# Altium PCB SemiPuente.PcbDoc
Units mm, origin at the board's own origin, x right, y up, seen from the top; angles counter-clockwise.
Board outline 100 x 99.9 mm, 2 copper layers (Top Layer, Bottom Layer); 17 components, 7 nets, 31 pads, 0 vias.
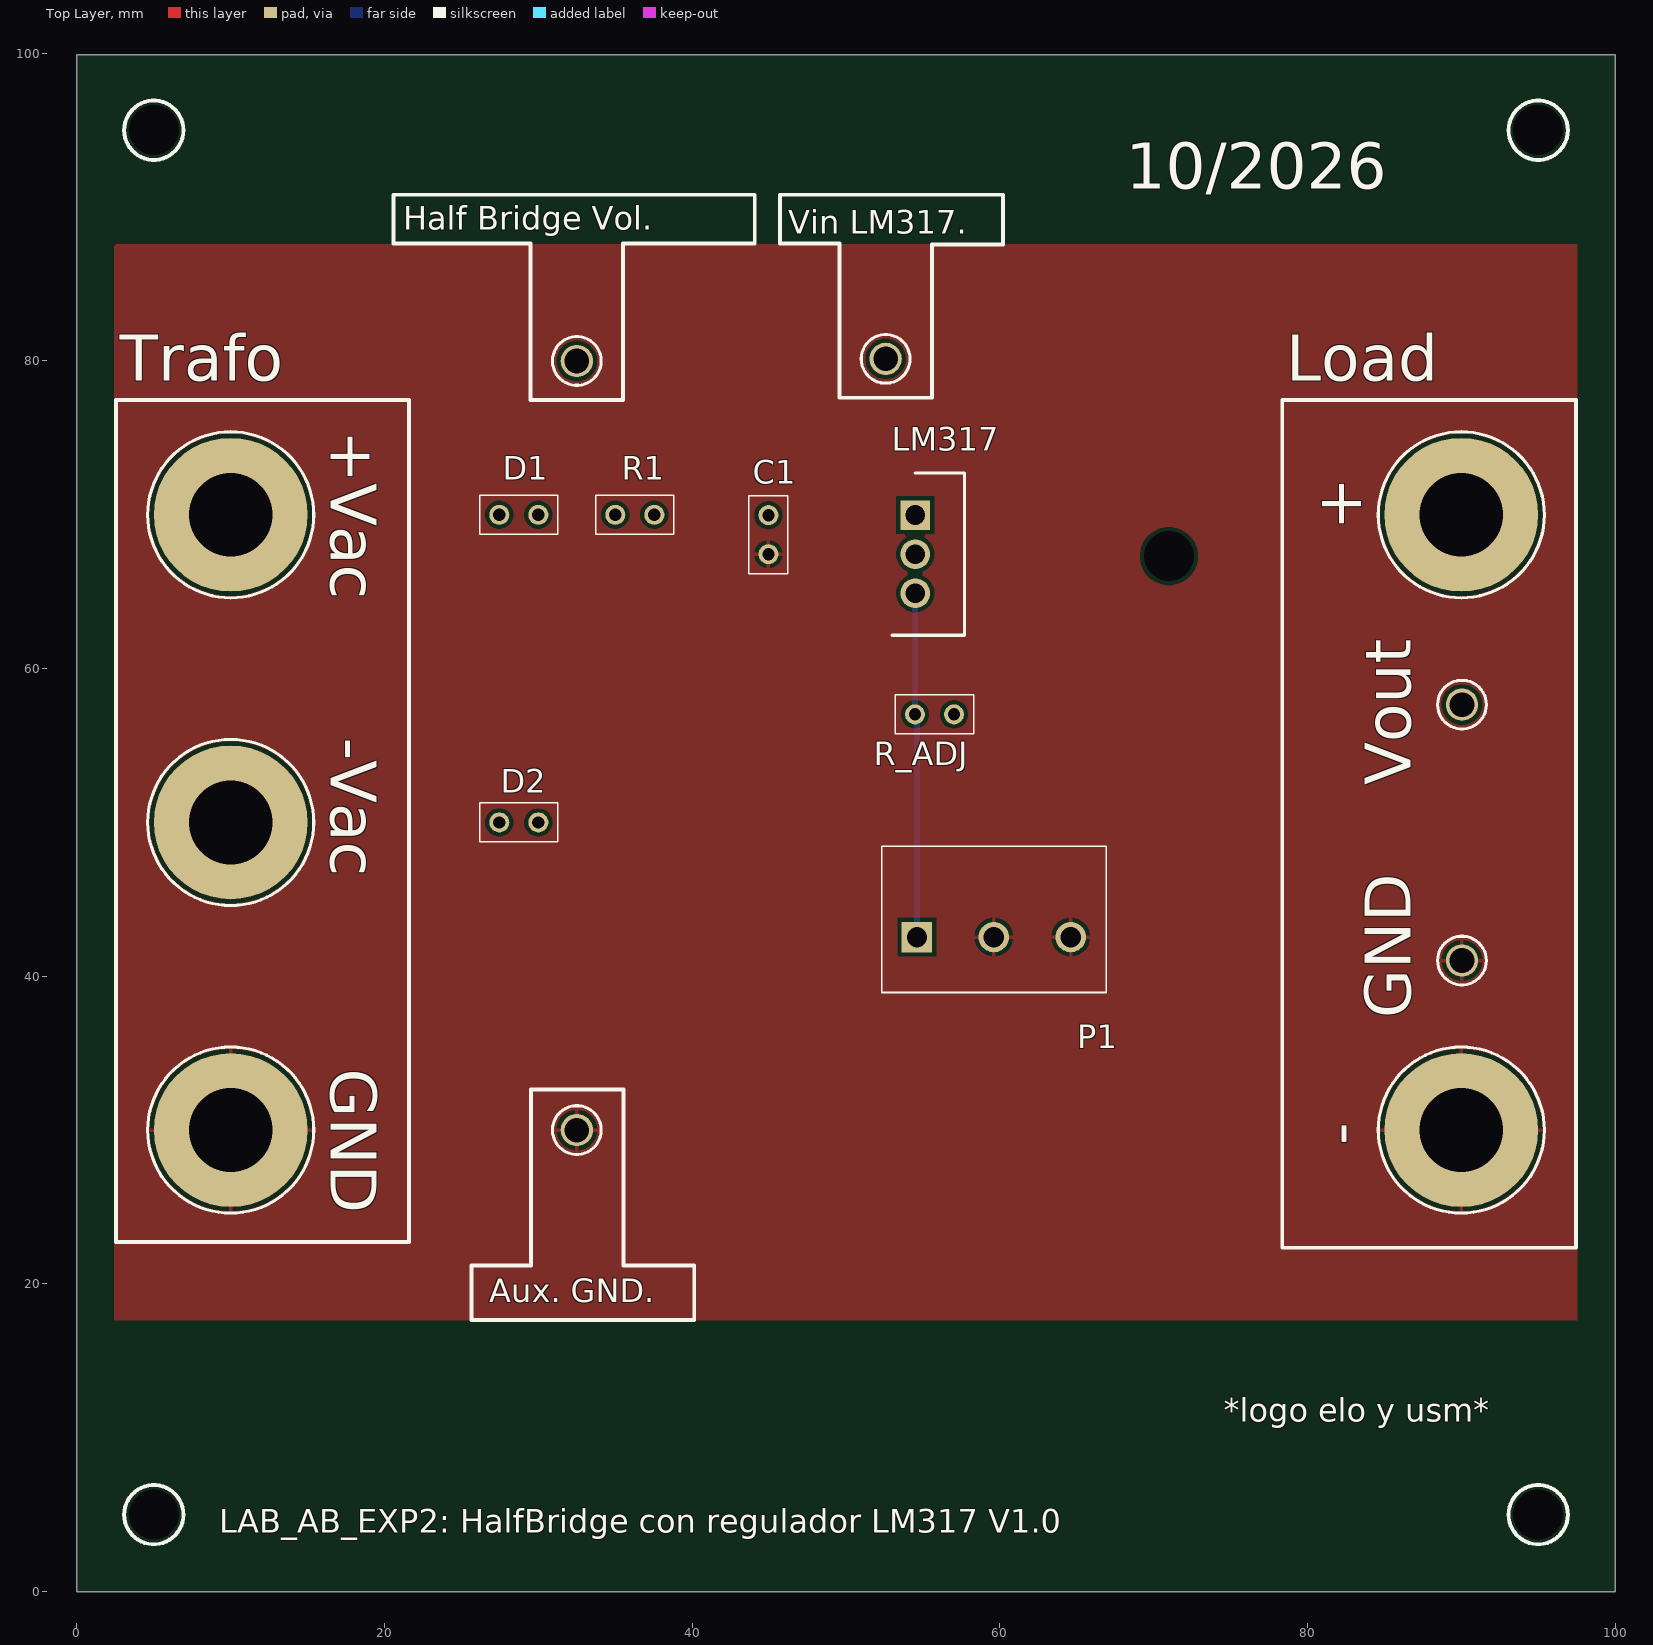
[diagram p0: Top Layer view]
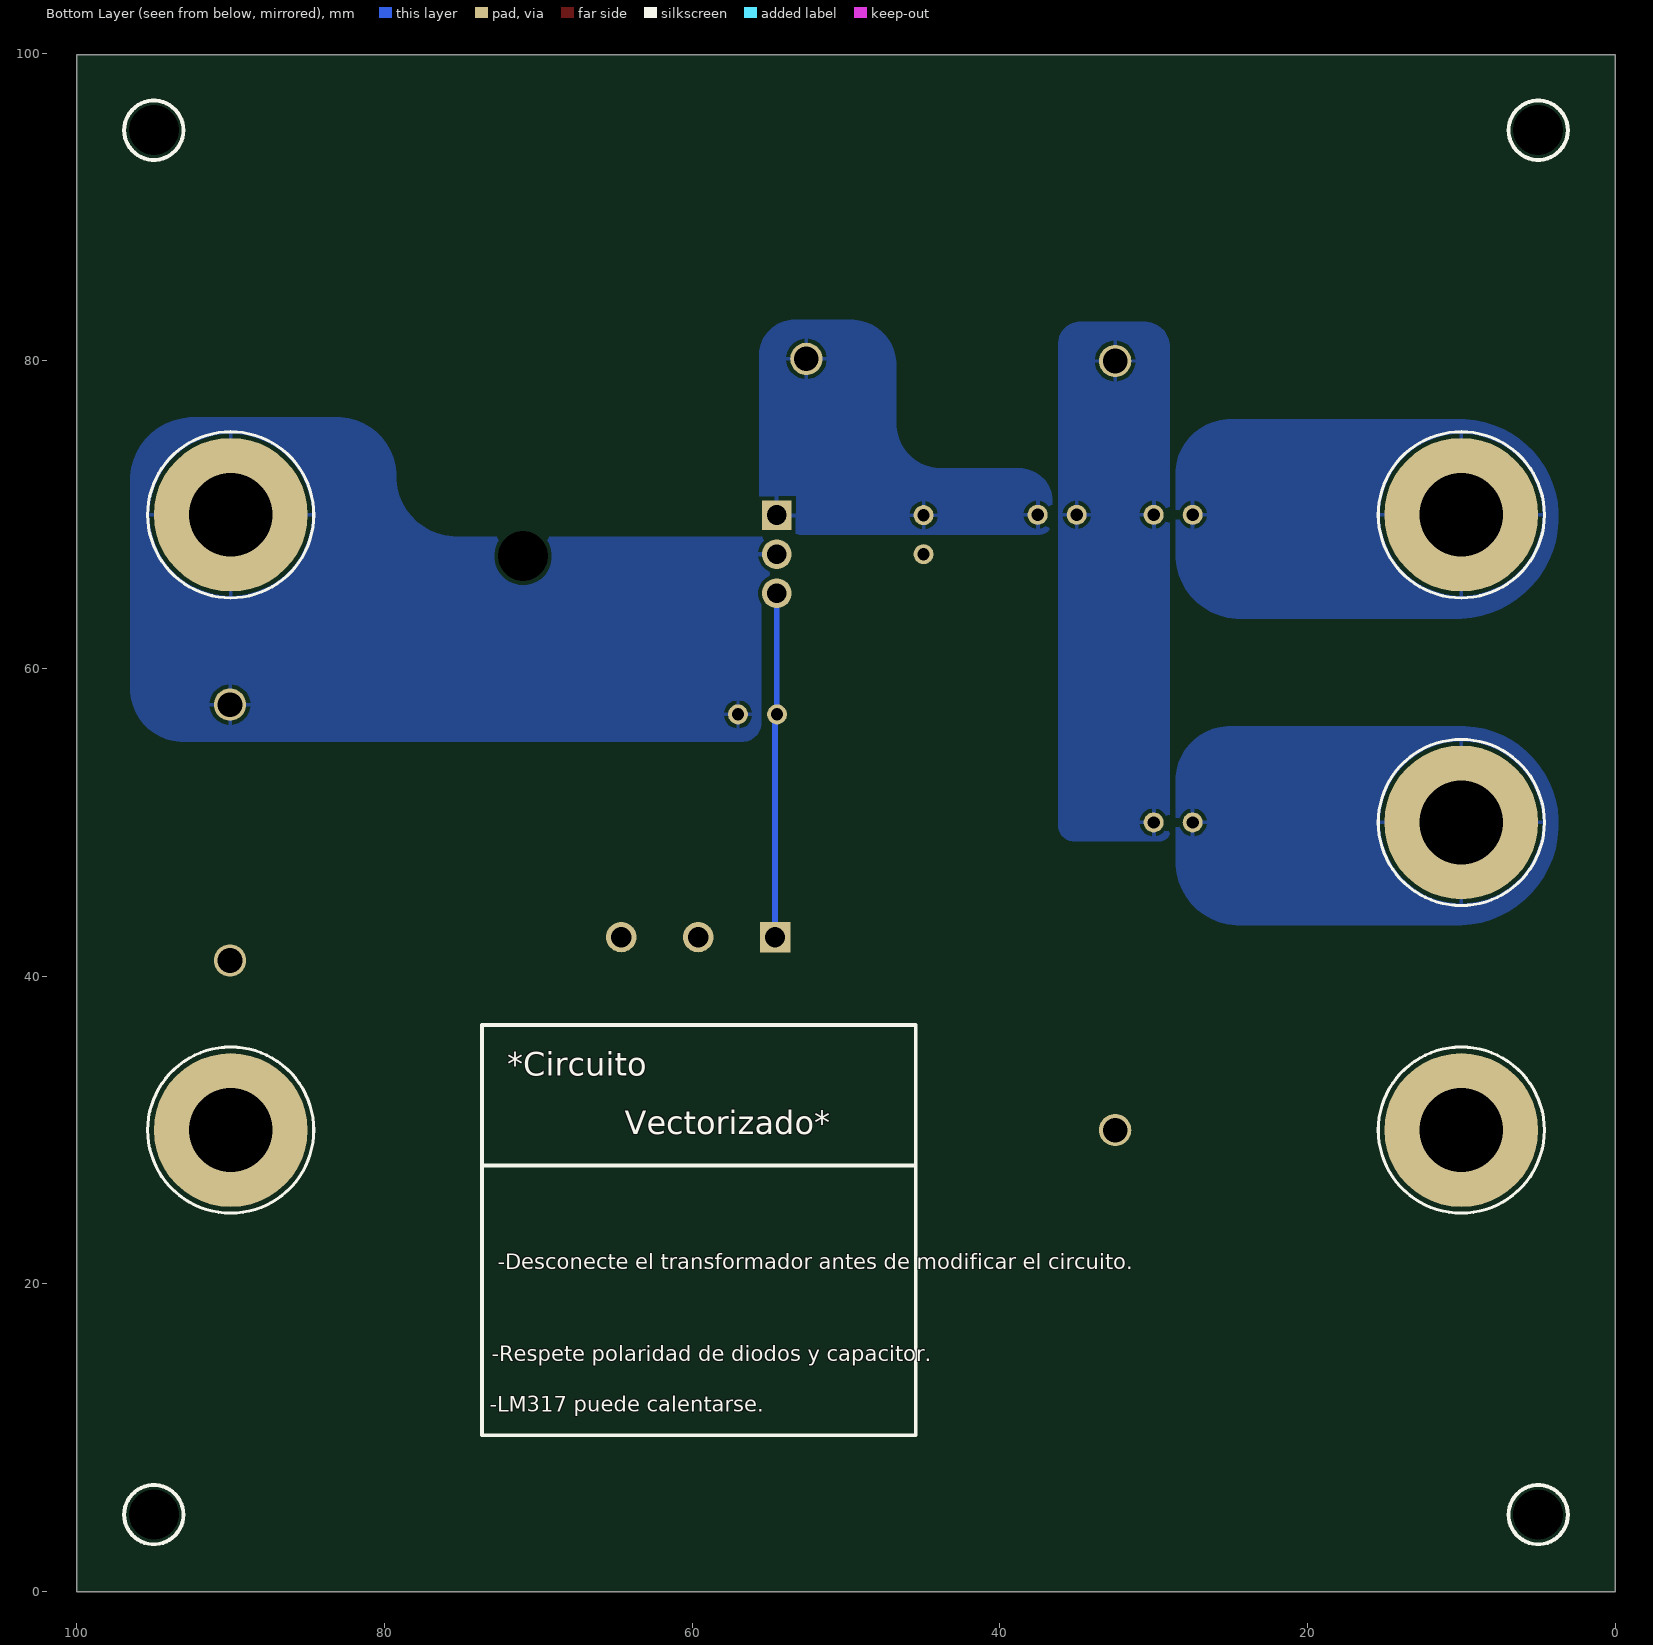
[diagram p1: Bottom Layer view, seen from below]
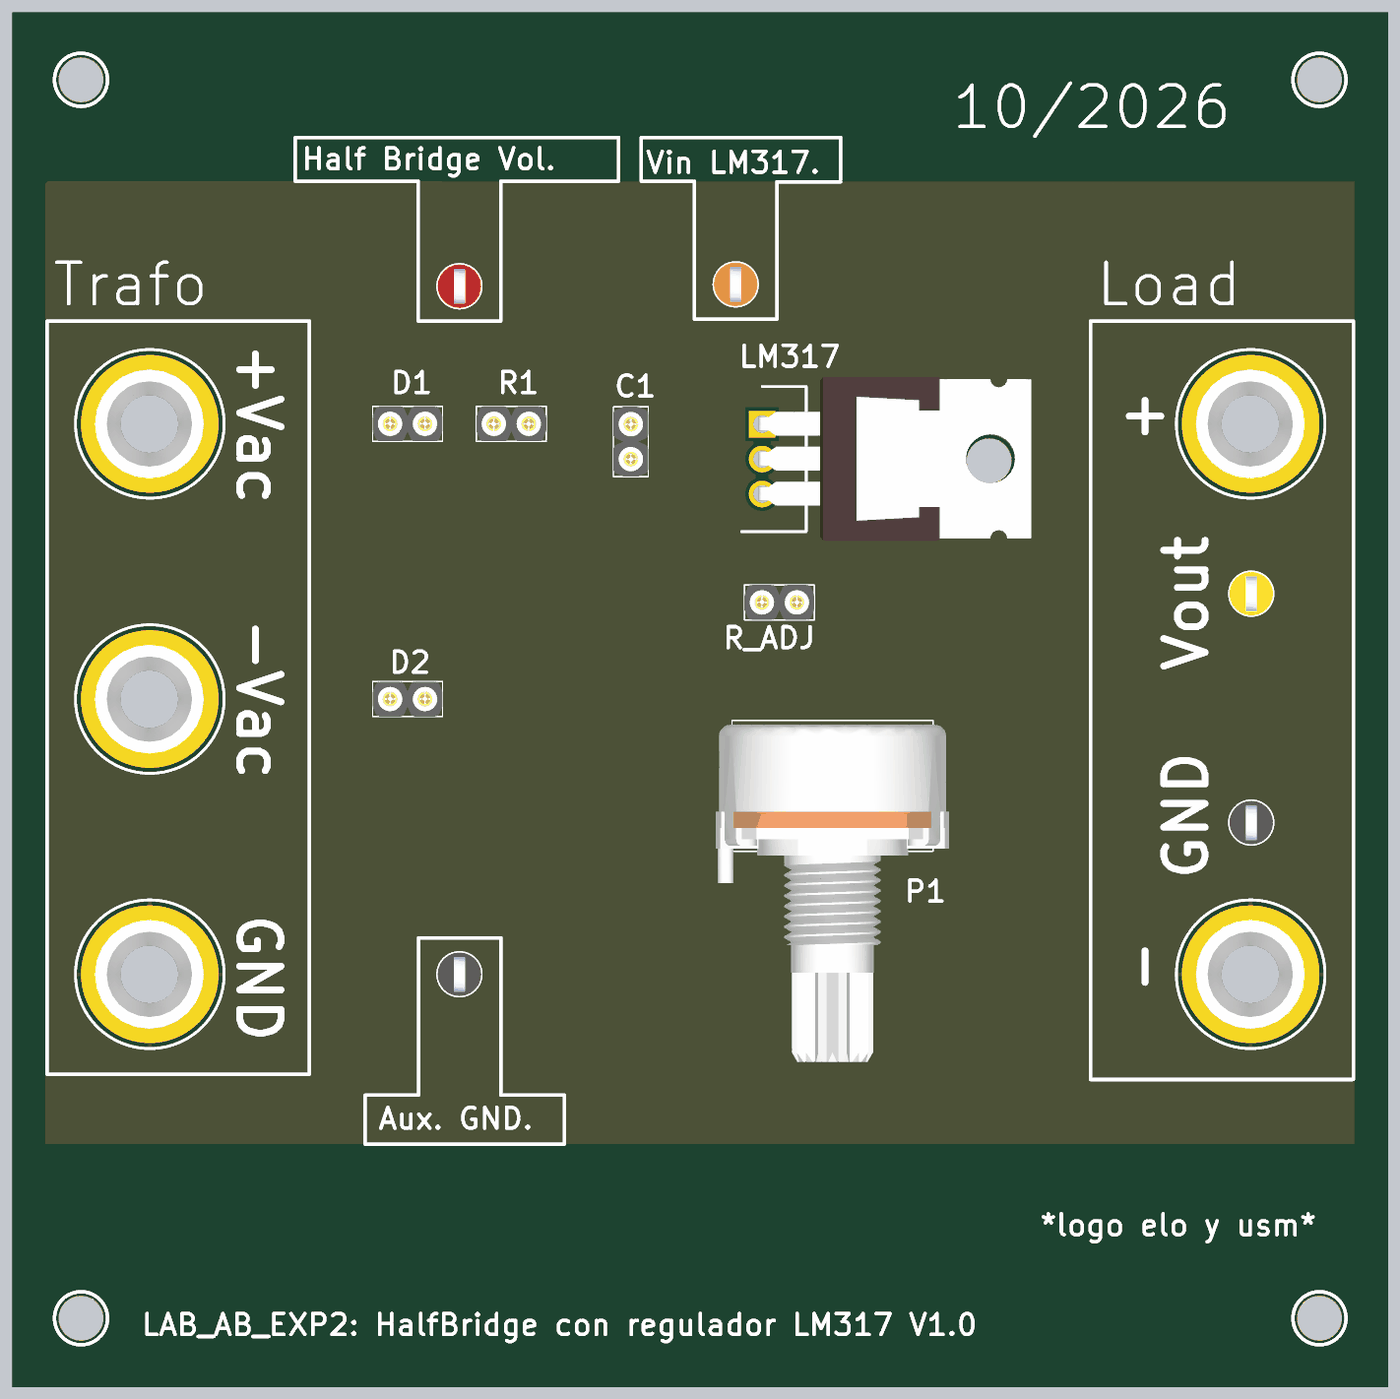
[diagram p2: 3D render of the assembled board from above, using the file's embedded part models]

## Layer stack, top to bottom
Top Solder: solder mask 0.0102, Solder Resist, Dk 3.5
Top Layer: signal copper 0.0356
Dielectric 1: dielectric 0.32, FR-4, Dk 4.8
Bottom Layer: signal copper 0.0356
Bottom Solder: solder mask 0.0102, Solder Resist, Dk 3.5

## Board outline
0,0 0,99.898 100,99.898 100,0

## Design rules (kind name [scope] priority, off if disabled: settings)
Clearance [All] p1: gap=0.254 ignorepadtopadclearanceinfootprint=FALSE
HoleSize [All] p1: absolutevalues=TRUE maxlimit=6 minlimit=0.025 maxpercent=80.000 minpercent=20.000
PolygonConnect [All] p1: connectstyle=Relief reliefconductorwidth=0.254 reliefentries=4 polygonreliefangle="90 Angle" airgapwidth=0.254
RoutingVias [All] p1: holewidth=0.711 width=1.27 viastyle="Through Hole" minholewidth=0.711 minwidth=1.27 maxholewidth=0.711 maxwidth=1.27
SolderMaskExpansion [All] p1: expansion=0 istentingtop=FALSE
SupplyNets "Schematic Supply Nets_2" [InNet('+VAC')] p1: voltage=0.000
SupplyNets "Schematic Supply Nets_1" [InNet('GND')] p2: voltage=0.000
SupplyNets "Schematic Supply Nets" [InNet('-VAC')] p3: voltage=0.000
Width [All] p1: maxlimit=3 minlimit=0.254 preferedwidth=0.254
29 further rules are at their usual default settings.

## Components (designator, comment, footprint, x,y, rotation, side; value= is the part's Value field where it differs from the comment)
+ "575-4" KSTN-575-4 90,70 r0 top (schematic designator TP1)
+Vac "575-4" KSTN-575-4 10,70 r0 top (schematic designator TP3)
- "575-4" KSTN-575-4 90,30 r0 top (schematic designator TP2)
-Vac "575-4" KSTN-575-4 10,50 r0 top (schematic designator TP4)
"Aux. GND." "5011" KSTN-5011_V 32.5,30 r270 top (schematic designator TP17)
C1 "D01-9970242" D019970242 44.958,67.437 r270 top (schematic designator J4)
D1 "D01-9970242" D019970242 30,70 r0 top locked (schematic designator J1)
D2 "D01-9970242" D019970242 30,50 r0 top locked (schematic designator J2)
GND "5011" KSTN-5011_V 90.043,41.021 r270 top (schematic designator TP7)
GND "575-4" KSTN-575-4 10,30 r0 top (schematic designator TP5)
"Half Bridge Vol." "5010" KSTN-5010_V 32.5,80 r270 top locked (schematic designator TP6)
LM317 "LM317AT_NOPB" TO254P470X1028X1955-3P 54.5,69.977 r270 top locked (schematic designator IC3)
P1 "PDB181-K420K-502B" PDB181K220K104B 54.61,42.545 r270 top locked (schematic designator VR2)
R1 "D01-9970242" D019970242 35,70 r180 top (schematic designator J3)
R_ADJ "D01-9970242" D019970242 57.023,57.023 r0 top (schematic designator J5)
"Vin LM317." "5013" KSTN-5013_V 52.578,80.137 r270 top locked (schematic designator TP9)
Vout "5014" KSTN-5014_V 90.043,57.658 r270 top (schematic designator TP8)

## Footprints (in the part's own frame and the unit in brackets; to place one, negate y for a bottom-side part, rotate by r counter-clockwise, add the part's x,y. Pads: shape width x height; smd on the part's side, far side on the other; paste and mask are expansions set on the pad)
D019970242 [mm]
  round 1.3 hole 0.8: 1(0,0) 2(-2.54,0)
  silkscreen extent -3.81,-1.27 1.27,1.27, body extent -3.81,-1.27 1.27,1.27, height 4.22
KSTN-575-4 [mm] "Banana Jack, Non-Insulated, Dia 7.92mm"
  round 10 hole 5.45: 1(0,0)
  silkscreen extent -5.4,-5.4 5.4,5.4, body extent -3.98,-3.96 3.92,3.94, height 2.36
KSTN-5010_V [mm] "Test Point, Dia 3.17mm"
  round 2.1 hole 1.6: 1(0,0)
  silkscreen extent -1.58,-1.59 1.58,1.59, body extent -1.59,-1.59 1.59,1.59, height 8.13
KSTN-5011_V [mm] "Test Point, Dia 3.17mm"
  round 2.1 hole 1.6: 1(0,0)
  silkscreen extent -1.58,-1.59 1.58,1.59, body extent -1.59,-1.59 1.59,1.59, height 8.13
KSTN-5013_V [mm] "Test Point, Dia 3.17mm"
  round 2.1 hole 1.6: 1(0,0)
  silkscreen extent -1.58,-1.59 1.58,1.59, body extent -1.59,-1.59 1.59,1.59, height 8.13
KSTN-5014_V [mm] "Test Point, Dia 3.17mm"
  round 2.1 hole 1.6: 1(0,0)
  silkscreen extent -1.58,-1.59 1.58,1.59, body extent -1.59,-1.59 1.59,1.59, height 8.13
PDB181K220K104B [mm]
  rect 1.98x1.98 hole 1.32: 1(0,0)
  round 1.98 hole 1.32: 2(0,5) 3(0,10)
  silkscreen extent -5.9,-2.3 3.6,12.3, body extent -5.58,-3.5 18.92,13.49, height 21.2
TO254P470X1028X1955-3P [mm]
  round 1.935 hole 1.29: 1(5.08,0) 2(2.54,0)
  rect 1.935x1.935 hole 1.29: 3(0,0)
  silkscreen extent -2.73,-1.5 7.81,3.2, body extent -3.43,-0.27 8.46,19.57, height 4.41

## Part data
+ +Vac - -Vac GND: library part CMP-2000-05649-1, "Banana Jack, Non-Insulated, 1-Pin THD, RoHS, Bulk", Color=-, Manufacturer=Keystone-Electronics, Package Description="1-Pin Through Hole Device, Dia 7.92 mm", Package Version="Rev. B, 11/1994", Body Material=-, Category=Connectors,Interconnects, Contact Finish=Nickel, Contact Material=Brass, Datasheet URL=http://www.keyelco.com/product-pdf.cfm?p=2379, Datasheet Version="Rev. B, 11/1994", Family=BananaandTipConnectors-Jacks,Plugs, Features=-, Gender=Female, Insulation=Non-Insulated, Manufacturer URL=http://www.keyelco.com/, Mounting Technology=ThroughHole, Mounting Type=ThroughHole, Operating Temperature=-, Package Reference=575-4, Package URL=http://www.keyelco.com/product-pdf.cfm?p=2379, Packaging=Bulk, Plug/Mating Plug Diameter=StandardBanana, Series=-, Termination=Solder, Type=BananaJack, Wire Gauge=-
"Aux. GND." GND: library part CMP-1672-00003-4, "Test Point, Black, Through Hole, RoHS, Bulk", Colour=Black, Manufacturer=Keystone, Package Quantity=100, ComponentLink1Description="Manufacturer URL", ComponentLink1URL=http://www.keyelco.com/, ComponentLink2Description=Datasheet, ComponentLink2URL=http://www.keyelco.com/product-pdf.cfm?p=1320, Contact Material=Bronze, Contact Plating=Silver, DatasheetVersion="Rev. F, 12/2013", Height="8.12 mm", Mount="Through Hole", Mounting Technology="Through Hole", PackageDescription="1-Pin Through Hole Device, Dia 3.17 mm", PackageReference=5011, Packaging=Bulk, Pins=1, REACH SVHC="No SVHC", RoHSCompliant=true
C1 D1 D2 R1 R_ADJ: "IC Socket: 2 Pos Receptacle SIL Straight THT Strip", Manufacturer_Name=Harwin, Mouser Part Number=855-D01-9970242, Datasheet Link=https://content.harwin.com/m/e0b6c35948424a73/original/DRG-00097-Technical-Drawing-Datasheet-D01-997-pdf.pdf, Geometry.Height=4.2mm, Manufacturer_Part_Number=D01-9970242, Mouser Price/Stock=https://www.mouser.co.uk/ProductDetail/Harwin/D01-9970242?qs=TpUtqFO9vU%252Bf37OJ5TYoTQ%3D%3D
"Half Bridge Vol.": library part CMP-1672-00002-4, "Test Point, Red, Through Hole, RoHS, Bulk", Colour=Red, Manufacturer=Keystone, Package Quantity=100, ComponentLink1Description="Manufacturer URL", ComponentLink1URL=http://www.keyelco.com/, ComponentLink2Description=Datasheet, ComponentLink2URL=http://www.keyelco.com/product-pdf.cfm?p=1319, Contact Material=Bronze, Contact Plating=Silver, DatasheetVersion="Rev. F, 12/2013", Height="8.12 mm", Mount="Through Hole", Mounting Technology="Through Hole", PackageDescription="1-Pin Through Hole Device, Dia 3.17 mm", PackageReference=5010, Packaging=Bulk, Pins=1, REACH SVHC="No SVHC", RoHSCompliant=true
LM317: "Integrated Circuit", Arrow Part Number=LM317AT/NOPB, Manufacturer_Name="Texas Instruments", Mouser Part Number=926-LM317AT/NOPB, Arrow Price/Stock=https://www.arrow.com/en/products/lm317atnopb/texas-instruments?utm_currency=USD&region=europe, Datasheet Link=http://www.ti.com/lit/gpn/lm317a, Height=4.7mm, Manufacturer_Part_Number=LM317AT/NOPB, Mouser Price/Stock=https://www.mouser.co.uk/ProductDetail/Texas-Instruments/LM317AT-NOPB?qs=X1J7HmVL2ZFYFJRcNgsWcQ%3D%3D
P1: "Variable Resistor", Manufacturer_Name=Bourns, Mouser Part Number=652-PDB181-K420K502B, Arrow Part Number=PDB181-K420K-502B, Arrow Price/Stock=https://www.arrow.com/en/products/pdb181-k420k-502b/bourns?region=nac, Datasheet Link=https://www.bourns.com/docs/product-datasheets/PDB18.pdf, Height=16.5mm, Manufacturer_Part_Number=PDB181-K420K-502B, Mouser Price/Stock=https://www.mouser.co.uk/ProductDetail/Bourns/PDB181-K420K-502B?qs=Ivs1Be2ZGq6EMYRq4LQhiA%3D%3D
"Vin LM317.": library part CMP-1672-00005-4, "Test Point, Orange, Through Hole, RoHS, Bulk", Colour=Orange, Manufacturer=Keystone, Package Quantity=100, ComponentLink1Description="Manufacturer URL", ComponentLink1URL=http://www.keyelco.com/, ComponentLink2Description=Datasheet, ComponentLink2URL=http://www.keyelco.com/product-pdf.cfm?p=1322, Contact Material=Bronze, Contact Plating=Silver, DatasheetVersion="Rev. F, 12/2013", Height="8.12 mm", Mount="Through Hole", Mounting Technology="Through Hole", PackageDescription="1-Pin Through Hole Device, Dia 3.17 mm", PackageReference=5013, Packaging=Bulk, REACH SVHC="No SVHC", RoHSCompliant=True
Vout: library part CMP-1672-00006-4, "Test Point, Yellow, Through Hole, RoHS, Bulk", Colour=Yellow, Manufacturer=Keystone, Package Quantity=100, ComponentLink1Description="Manufacturer URL", ComponentLink1URL=http://www.keyelco.com/, ComponentLink2Description=Datasheet, ComponentLink2URL=http://www.keyelco.com/product-pdf.cfm?p=1323, Contact Material=Bronze, Contact Plating=Silver, DatasheetVersion="Rev. F, 12/2013", Height="8.12 mm", Mount="Through Hole", Mounting Technology="Through Hole", PackageDescription="1-Pin Through Hole Device, Dia 3.17 mm", PackageReference=5014, Packaging=Bulk, REACH SVHC="No SVHC", RoHSCompliant=true

## Free pads (board coordinates)
  round 0 hole 3.25: 7(5,5) 7(5,95) 7(70.993,67.31) 7(95,5) 7(95,95)

## Nets (pads, with @x,y where several pads share a name; then routed paths per layer and width w, separated by ;. In a path a pad name is that pad's centre, name@x,y a point inside that pad or via, vN(x,y) a via of type N, cw(c..) or ccw(c..) an arc to the next point about the centre after c; other vN are vias at no path point)
+VAC: +Vac.1 D1.2
-VAC: -Vac.1 D2.2
ADJ_317: LM317.1 P1.1 R_ADJ.2 | length 22.4
  Bottom Layer w0.381: R_ADJ.2 54.61,56.896 P1.1 ; R_ADJ.2@54.5,57.023 LM317.1
GND: "Aux. GND..1" -.1 C1.1 GND.1 P1.2 P1.3
HalfBridge: "Half Bridge Vol..1" D1.1 D2.1 R1.1
IN_317: "Vin LM317..1" C1.2 LM317.3 R1.2
OUT_317: +.1 LM317.2 R_ADJ.1 Vout.1 | length 2.5
  Top Layer w0.254: +.1@87.516,70 +.1

## Polygon pours and split planes (outlines as drawn)
IN_317 on Bottom Layer "IN_317_L02_P004" (solid, pour order 4): 36.576,69.596 36.576,70.866 cw(c38.735,70.866) 38.735,73.025 43.815,73.025 ccw(c43.815,75.946) 46.736,75.946 46.736,79.756 cw(c49.657,79.756) 49.657,82.677 53.34,82.677 cw(c53.34,80.391) 55.626,80.391 55.626,69.723 cw(c54.61,69.723) 54.61,68.707 37.465,68.707 cw(c37.465,69.596)
OUT_317 on Bottom Layer "OUT_317_L02_P005" (solid, pour order 5): 79.248,72.517 cw(c83.058,72.517) 83.058,76.327 92.456,76.327 cw(c92.456,72.263) 96.52,72.263 96.52,58.674 cw(c93.091,58.674) 93.091,55.245 56.769,55.245 cw(c56.769,56.515) 55.499,56.515 55.499,65.151 ccw(c54.483,65.151) 54.483,66.167 53.975,66.167 cw(c54.347,67.373) 53.975,68.58 75.311,68.58 ccw(c75.311,72.517)
HalfBridge on Bottom Layer "HALFBRIDGE_L02_P002" (solid, pour order 2): 28.956,49.403 28.956,80.899 cw(c30.607,80.899) 30.607,82.55 34.798,82.55 cw(c34.798,81.153) 36.195,81.153 36.195,49.784 cw(c35.179,49.784) 35.179,48.768 29.591,48.768 cw(c29.591,49.403)
-VAC on Bottom Layer "-VAC_L02_P001" (solid, pour order 1): 28.575,52.701 28.575,47.494 cw(c24.384,47.494) 24.384,43.303 10.287,43.303 cw(c10.287,49.907) 3.683,49.907 cw(c10.033,49.907) 10.033,56.257 25.019,56.257 cw(c25.019,52.701)
+VAC on Bottom Layer "+VAC_L02_P000" (solid, pour order 0): 28.575,72.644 28.575,67.437 cw(c24.384,67.437) 24.384,63.246 10.287,63.246 cw(c10.287,69.85) 3.683,69.85 cw(c10.033,69.85) 10.033,76.2 25.019,76.2 cw(c25.019,72.644)
GND on Top Layer "GND_L01_P006" (solid, pour order 6): 2.413,87.629 97.536,87.592 97.536,17.653 2.413,17.653

## Silkscreen, mask and mechanical layers (free items; w line width, h text height)
Top Overlay:
  circle w0.254: c95,95 r1.927
  circle w0.254: c95,5 r1.927
  circle w0.254: c5,5 r1.927
  circle w0.254: c5,95 r1.927
  lines w0.254: 29.5,77.47 29.5,87.63 20.574,87.63 20.574,90.805 44.069,90.805 44.069,87.63 35.5,87.63 35.5,77.47 29.591,77.47 ; 35.433,32.639 29.524,32.639 29.524,22.098 29.524,21.209 25.654,21.209 25.654,17.653 40.132,17.653 40.132,21.209 35.524,21.209 35.524,21.971 35.524,32.639 ; 97.409,22.352 78.359,22.352 78.359,75.057 78.359,76.581 78.359,77.47 97.409,77.47 ; 97.46,22.352 97.46,77.47 ; 2.54,22.733 2.54,77.47 21.59,77.47 21.59,22.733 2.54,22.733 ; 45.72,87.63 48.816,87.63 49.578,87.63 49.578,77.607 55.578,77.607 55.578,87.582 60.198,87.582 60.198,90.805 45.72,90.805 45.72,87.63
  text "10/2026" at 68.199,91.186 h3
  text "Trafo" at 2.794,78.724 h3
  text "Load" at 78.613,78.724 h3
  text "*logo elo y usm*" at 74.549,11.049 h1.52
  text "LAB_AB_EXP2: HalfBridge con regulador LM317 V1.0" at 9.271,3.81 h1.52
Bottom Overlay:
  circle w0.254: c5,5 r1.927
  circle w0.254: c5,95 r1.927
  circle w0.254: c95,5 r1.927
  circle w0.254: c95,95 r1.927
  lines w0.254: 45.466,27.686 73.66,27.686 ; 45.466,10.16 45.466,36.83 73.66,36.83 73.66,10.16 45.466,10.16
  text "*Circuito" at 72.009,33.528 h1.52
  text "Vectorizado*" at 64.389,29.718 h1.52
  text "-Desconecte el transformador antes de modificar el circuito." at 72.644,20.955 h1
  text "-Respete polaridad de diodos y capacitor." at 73.025,14.986 h1
  text "-LM317 puede calentarse." at 73.152,11.684 h1